# Altium PCB PrototypeV4.PcbDoc
Units mm, origin at the board's own origin, x right, y up, seen from the top; angles counter-clockwise.
Board outline 15 x 20 mm, 2 copper layers (Top Layer, Bottom Layer); 16 components, 39 nets, 67 pads, 6 vias.
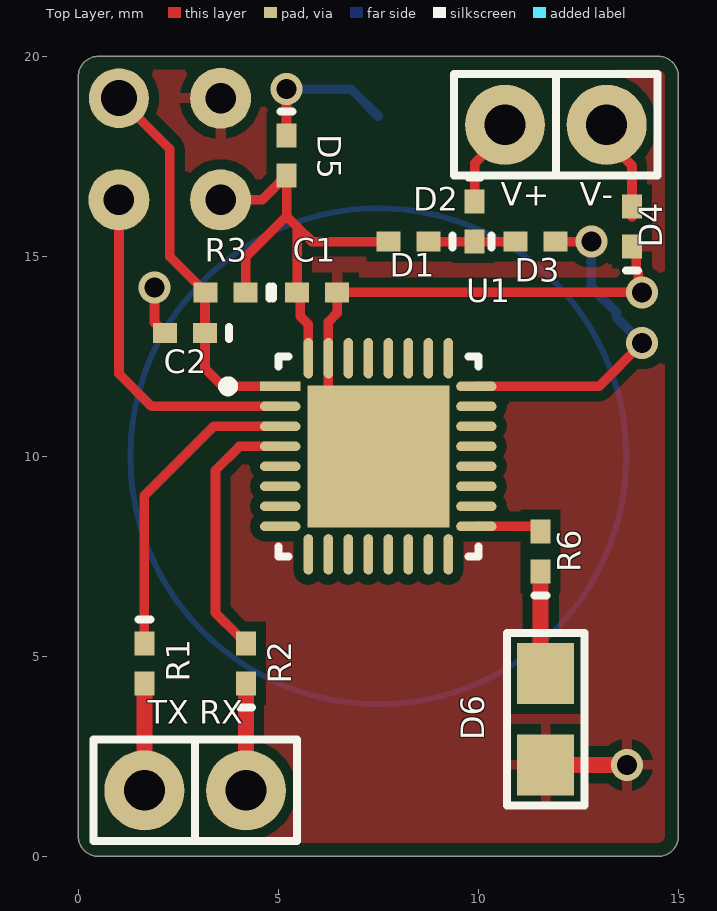
[diagram p0: Top Layer view]
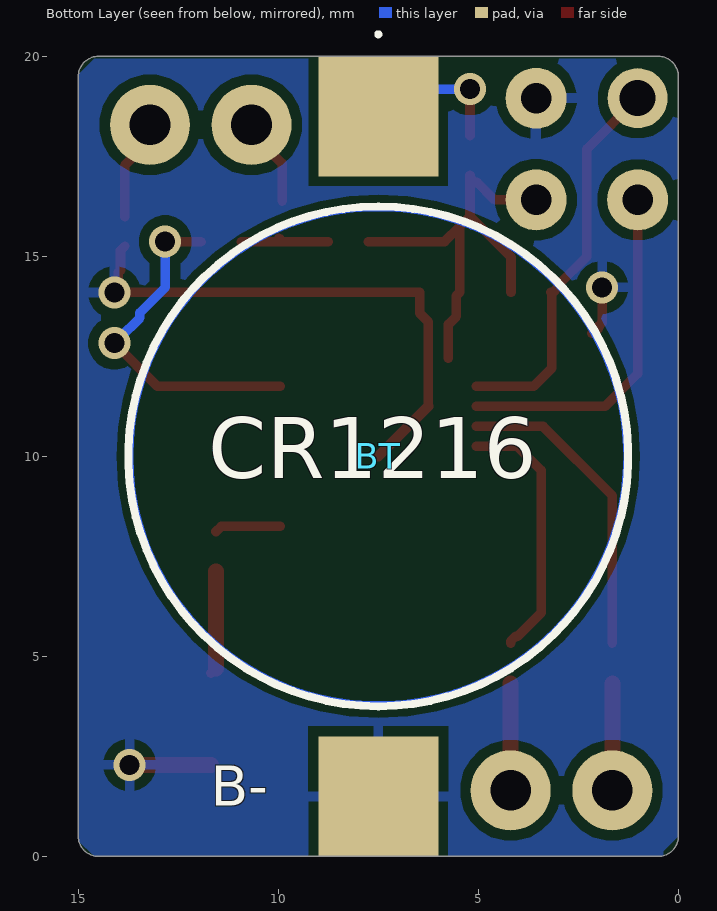
[diagram p1: Bottom Layer view, seen from below]

## Layer stack, top to bottom
Top Solder: solder mask 0.0102, Solder Resist, Dk 3.5
Top Layer: signal copper 0.0356
Dielectric 1: dielectric 0.32, FR-4, Dk 4.8
Bottom Layer: signal copper 0.0356
Bottom Solder: solder mask 0.0102, Solder Resist, Dk 3.5

## Board outline
0,0.5 0,19.5 cw(c0.5,19.5) 0.5,20 14.5,20 cw(c14.5,19.5) 15,19.5 15,0.5 cw(c14.5,0.5) 14.5,0 0.5,0 cw(c0.5,0.5)

## Design rules (kind name [scope] priority, off if disabled: settings)
Clearance [All] p1: gap=0.254 ignorepadtopadclearanceinfootprint=TRUE except(0: Arc-Hole Track-Hole SMDPad-Hole THPad-Hole Via-Hole Fill-Hole Poly-Hole Region-Hole Text-Hole; 0.127: SMDPad-SMDPad; 0.33: Arc-THPad Track-THPad)
PolygonConnect [All] p1: connectstyle=Relief reliefconductorwidth=0.254 reliefentries=4 polygonreliefangle="90 Angle" airgapwidth=0.254
RoutingVias [All] p1: holewidth=0.5 width=0.8 viastyle="Through Hole" minholewidth=0.5 minwidth=0.8 maxholewidth=0.711 maxwidth=1.27
SolderMaskExpansion [All] p1: expansion=0.102 istentingtop=FALSE
Width [All] p1: maxlimit=0.5 minlimit=0.127 preferedwidth=0.254
30 further rules are at their usual default settings.

## Components (designator, comment, footprint, x,y, rotation, side; value= is the part's Value field where it differs from the comment)
BT "CR1216_MFR_SM" CR1216MFRSM 7.5,10 r270 bottom locked
C1 "100nF" 0402-A 5.969,14.097 r0 top
C2 "4.7nF" 0402-A 2.667,13.081 r180 top
D1 "1N4148WL2-TP" 0402-A 8.255,15.367 r180 top
D2 "1N4148WL2-TP" 0402-A 9.906,15.875 r270 top
D3 "1N4148WL2-TP" 0402-A 11.43,15.367 r0 top
D4 "CDBQR70" 0402-A 13.843,15.748 r90 top
D5 "CDBQR70" 0402-A 5.207,17.526 r270 top
D6 "LED" 0805 11.684,3.429 r270 top
R1 "100" 0402-A 1.651,4.826 r270 top
R2 "100" 0402-A 4.191,4.826 r90 top
R3 "47k" 0402-A 3.683,14.097 r180 top
R6 "2k2" 0402-A 11.557,7.62 r90 top
"TX RX" "CON2" SIP2 2.921,1.65 r0 top
U1 "MSP430FR2476TRHBR" FP-RHB0032E-IPC_A 7.5,10 r0 top
"V+   V-" "CON2" SIP2 11.938,18.288 r0 top (schematic designator "V+ V-")

## Footprints (in the part's own frame and the unit in brackets; to place one, negate y for a bottom-side part, rotate by r counter-clockwise, add the part's x,y. Pads: shape width x height; smd on the part's side, far side on the other; paste and mask are expansions set on the pad)
0402-A [mm] "Chip Inductor, Body 1.0x0.5mm, IPC High Density"
  rect 0.6x0.5 smd: 1(-0.5,0) 2(0.5,0)
  silkscreen extent -1.1,-0.15 -1.1,0.15, body extent -0.55,-0.3 0.55,0.3, height 0.55
0805 [mil] "Pasivo 0805"
  rect 60x56 smd: 1(-45,0) 2(45,0)
  silkscreen extent -85,-38 85,38, body extent -40,-25 39,25, height 15
CR1216MFRSM [mm]
  rect 3x3 smd: 1(-8.5,0) 2(8.5,0)
  silkscreen extent -10.6,-6.25 6.25,6.25
FP-RHB0032E-IPC_A [mm]
  rect 1.01x0.242 smd paste+0 mask+0: 1(-2.451,1.75)
  rrect100% 1.01x0.242 smd paste+0 mask+0: 2(-2.451,1.25) 3(-2.451,0.75) 4(-2.451,0.25) 5(-2.451,-0.25) 6(-2.451,-0.75) 7(-2.451,-1.25) 8(-2.451,-1.75) 17(2.451,-1.75) 18(2.451,-1.25) 19(2.451,-0.75) 20(2.451,-0.25) 21(2.451,0.25) 22(2.451,0.75) 23(2.451,1.25) 24(2.451,1.75)
  rrect100% 0.242x1.01 smd paste+0 mask+0: 9(-1.75,-2.451) 10(-1.25,-2.451) 11(-0.75,-2.451) 12(-0.25,-2.451) 13(0.25,-2.451) 14(0.75,-2.451) 15(1.25,-2.451) 16(1.75,-2.451) 25(1.75,2.451) 26(1.25,2.451) 27(0.75,2.451) 28(0.25,2.451) 29(-0.25,2.451) 30(-0.75,2.451) 31(-1.25,2.451) 32(-1.75,2.451)
  rect 3.55x3.55 smd paste-1000 mask+0: 33(0,0)
  silkscreen extent -3.88,-2.5 2.5,2.5, body extent -3.46,-3.46 3.46,3.46, height 0.25
SIP2 [mm]
  round 2 hole 1.02: 1(-1.27,0) 2(1.27,0)
  silkscreen extent -2.54,-1.27 2.54,1.27

## Part data
BT: "Battery", Manufacturer_Name=RENATA, Manufacturer_Part_Number="CR1216 MFR SM", Mouser Part Number=614-CR1216-MFR-SM, Datasheet Link=https://www.renatabatteries.us/products/batteries/lithium-coin-tabbed/cr1216-mfr-sm, Height=2.1mm, Mouser Price/Stock=https://www.mouser.co.uk/ProductDetail/Renata/CR1216-MFR-SM?qs=4nVQHMCMxQx0A4GUuQVNLg%3D%3D
C1: library part CAP, "CL05B104KP5VPNC"
C2: library part CAP, "C0402C472K5RECAUTO"
D1 D2 D3: library part DIODO
D4 D5: library part "DIODO SCHOTTKY", "CDBQR70 / DIODE SCHOTTKY 70V 70MA 0402 / Current - Reverse Leakage @ Vr / 100 nA @ 50 V"
D6: "LED GREEN CLEAR 2012 SMD"
R1 R2: library part RES, "RC0402FR-07100RL"
R3: library part RES, "ERJ-2GEJ473X"
R6: library part RES, "RC0402FR-072K2L"
U1: library part CMP-04869-000099-1, "IC MCU 16BIT 64.5KB FRAM 32VQFN"

## Free pads (board coordinates)
  round 1.524 hole 0.762: 9(1.016,16.412) 9(3.556,16.412) 9(3.556,18.952)
  round 1.5 hole 0.9: 9(1.016,18.952)

## Via types
v1: diameter 0.8, hole 0.5, Top Layer to Bottom Layer, 6 vias

## Nets (pads, with @x,y where several pads share a name; then routed paths per layer and width w, separated by ;. In a path a pad name is that pad's centre, name@x,y a point inside that pad or via, vN(x,y) a via of type N, cw(c..) or ccw(c..) an arc to the next point about the centre after c; other vN are vias at no path point)
Base_Detect: D3.2 U1.24 | length 8.1
  Top Layer w0.24: U1.24 13.02,11.75 v1(14.097,12.827) ; D3.2 v1@12.573,15.367
  Bottom Layer w0.24: v1(12.827,15.367) 12.827,14.224 13.462,13.589 13.462,13.462 v1@13.97,12.954
Bat-: BT.2 C1.2 C2.2 D4.1 D6.2 pad.9@3.556,18.952 U1.31 U1.33 | length 16.9
  Top Layer w0.24: v1(1.905,14.224) 1.905,13.343 1.987,13.261 1.987,13.211 2.117,13.081 C2.2 ; U1.33@6.25,11.25 U1.31 6.25,13.362 6.469,13.581 C1.2 v1(14.097,14.097) 14.002,14.192 14.002,14.597 13.946,14.654 13.946,15.145 D4.1
  Top Layer w0.254: U1.33@6.25,11.25 U1.33
  Top Layer w0.4: D6.2 v1(13.716,2.286)
DVCC: C1.1 D1.2 D5.2 pad.9@3.556,16.412 R3.1 U1.32 | length 11.5
  Top Layer w0.24: pad.9@3.556,16.412 4.593,16.412 5.027,16.846 5.077,16.846 D5.2@5.207,16.976 ; R3.1 4.183,14.978 5.207,16.002 ; D5.2 D5.2@5.207,16.976 ; U1.32 5.75,13.3 5.549,13.501 5.549,14.017 C1.1 5.469,15.74 ; D1.2 5.842,15.367 5.469,15.74 ; 5.207,16.002 D5.2@5.207,16.976 ; 5.207,16.002 5.469,15.74
GNDext: "V+   V-.2" D4.2 | length 2.6
  Top Layer w0.24: 13.208,18.288 13.208,17.902 13.843,17.267 D4.2 D4.2@13.843,15.994
NC: U1.20
NetBT_1: BT.1 D5.1 | length 3.5
  Top Layer w0.254: D5.1 v1@5.207,18.923
  Bottom Layer w0.24: v1(5.207,19.177) 6.823,19.177 BT.1
NetD1_1: D1.1 D2.2 D3.1 | length 2.3
  Top Layer w0.24: D1.1 D3.1 ; D2.2 D2.2@9.986,15.455
NetD6_1: D6.1 R6.1 | length 2.6
  Top Layer w0.24: D6.1@11.557,4.699 D6.1
  Top Layer w0.4: D6.1@11.557,4.699 R6.1
P1.0: U1.7
P1.1: U1.8
P1.2: U1.9
P1.3: U1.10
P1.4: R1.1 U1.3 | length 7.8
  Top Layer w0.24: R1.1 1.651,9.017 3.384,10.75 U1.3
P1.5: R2.2 U1.4 | length 6.5
  Top Layer w0.24: R2.2 4.191,5.376 4.061,5.506 4.011,5.506 3.429,6.088 3.429,9.652 4.027,10.25 U1.4
P1.6: U1.5
P1.7: U1.6
P2.0: U1.29
P2.1: U1.30
P2.2: U1.11
P2.3: U1.14
P2.4: R6.2 U1.17 | length 1.7
  Top Layer w0.24: U1.17 11.427,8.25 R6.2
P2.5: U1.18
P2.6: U1.19
P2.7: U1.25
P3.0: U1.12
P3.1: U1.16
P3.2: U1.27
P3.3: U1.13
P3.4: U1.15
P3.5: U1.26
P3.6: U1.28
P3.7: U1.21
P4.0: U1.22
P4.1: U1.23
RSTn: C2.1 pad.9@1.016,18.952 R3.2 U1.1 | length 9.8
  Top Layer w0.24: pad.9@1.016,18.952 2.286,17.682 2.286,14.994 3.003,14.277 3.003,14.227 3.133,14.097 R3.2 3.167,14.081 C2.1 3.167,12.2 3.617,11.75 U1.1
RX: "TX RX.2" R2.1 | length 2.7
  Top Layer w0.4: 4.191,1.651 R2.1
TEST: pad.9@1.016,16.412 U1.2 | length 8.7
  Top Layer w0.24: pad.9@1.016,16.412 1.016,12.065 1.831,11.25 U1.2
TX: "TX RX.1" R1.2 | length 2.7
  Top Layer w0.4: 1.651,1.651 R1.2
Vext: "V+   V-.1" D2.1 | length 2.4
  Top Layer w0.24: D2.1 9.906,17.325 10.668,18.087 10.668,18.169 10.668,18.288 10.787,18.169
copper on no net: | length 39
  Bottom Layer w0.15: 13.7,10 ccw(c7.5,10) 13.7,10

## Polygon pours and split planes (outlines as drawn)
Bat- on Top Layer "NONET_L-01_P-001" (solid, remove dead copper, pour order 0): 0,0.508 0.381,0.127 0.381,0 14.605,0 14.986,0.381 14.986,19.558 14.605,19.939 0.508,19.939 0,19.431
Bat- on Bottom Layer "NONET_L-01_P-001" (solid, remove dead copper, pour order 1): 0,0.508 0.381,0.127 0.381,0 14.605,0 14.986,0.381 14.986,19.558 14.605,19.939 0.508,19.939 0,19.431

## Silkscreen, mask and mechanical layers (free items; w line width, h text height)
Bottom Overlay:
  text "CR1216" at 11.746,9.454 h1.52
  text "B-" at 11.684,1.27 h1
Mechanical 1:
  the board outline again, w0.15